# Altium PCB Testo2.PcbDoc
Units mm, origin at the board's own origin, x right, y up, seen from the top; angles counter-clockwise.
Board outline 41.56 x 22.07 mm, 2 copper layers (Top Layer, Bottom Layer), stack 0.833 mm thick; 59 components, 42 nets, 242 pads, 92 vias.
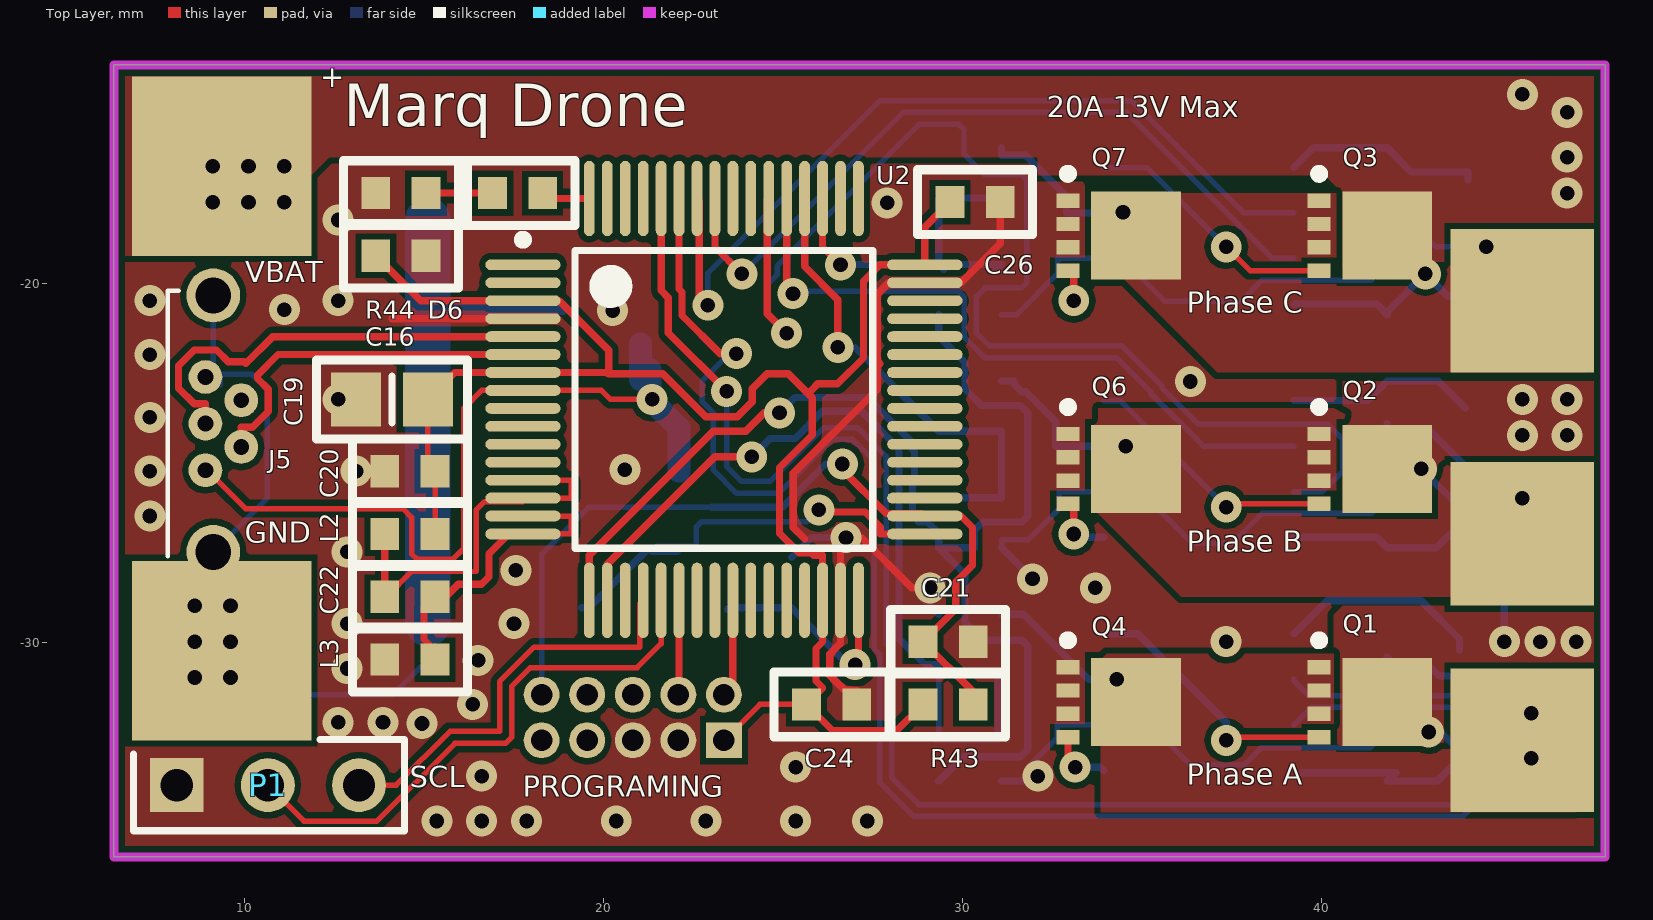
[diagram p0: Top Layer view]
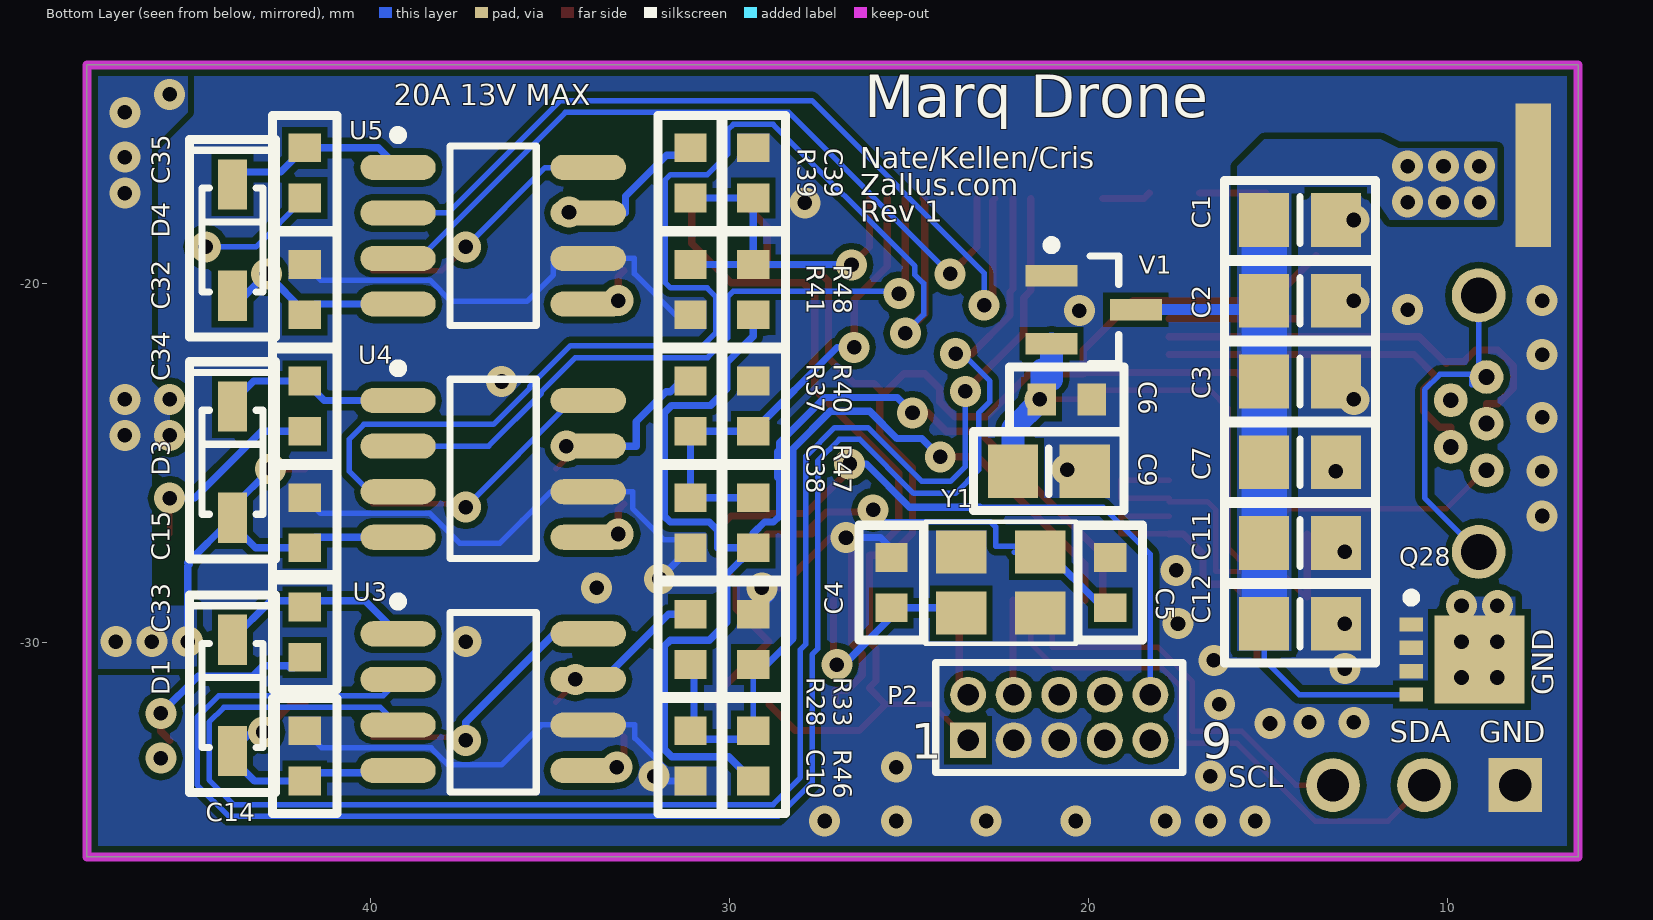
[diagram p1: Bottom Layer view, seen from below]
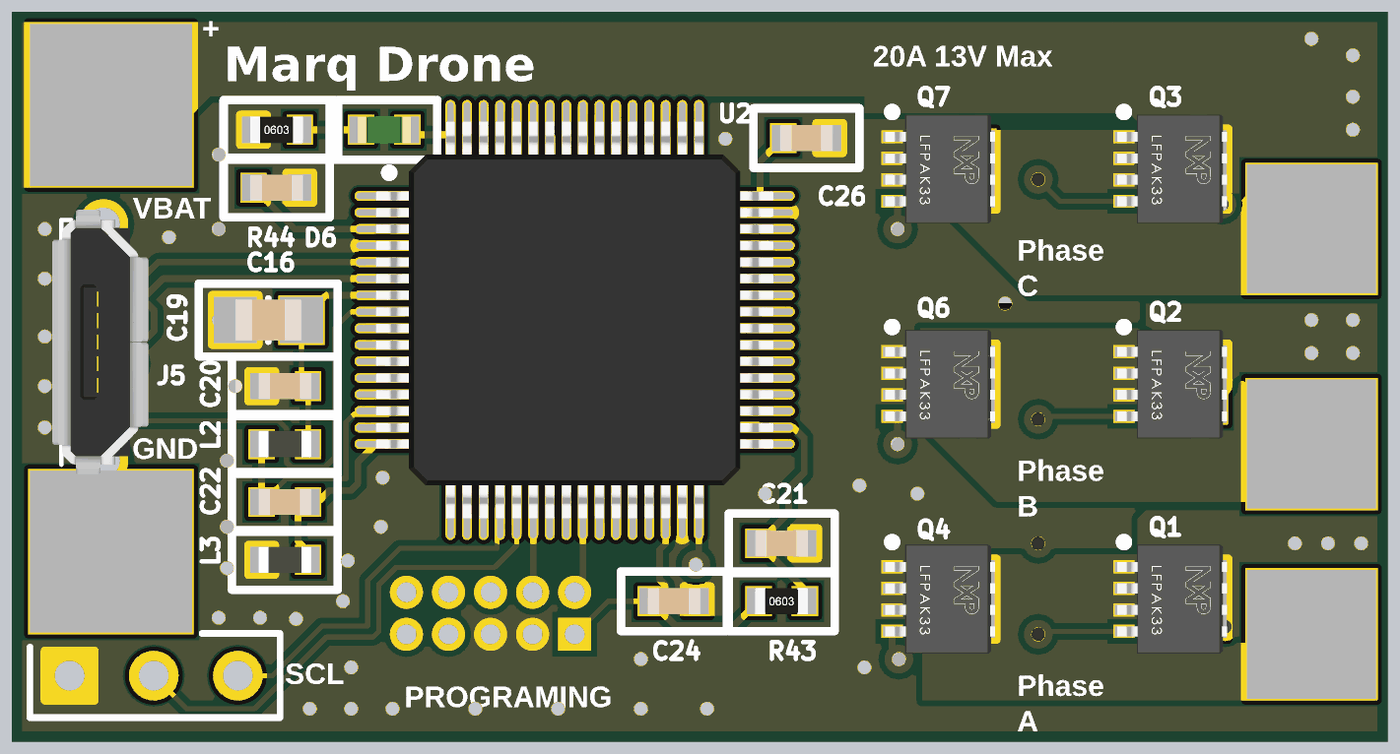
[diagram p2: 3D render of the assembled board from above, using the file's embedded part models]
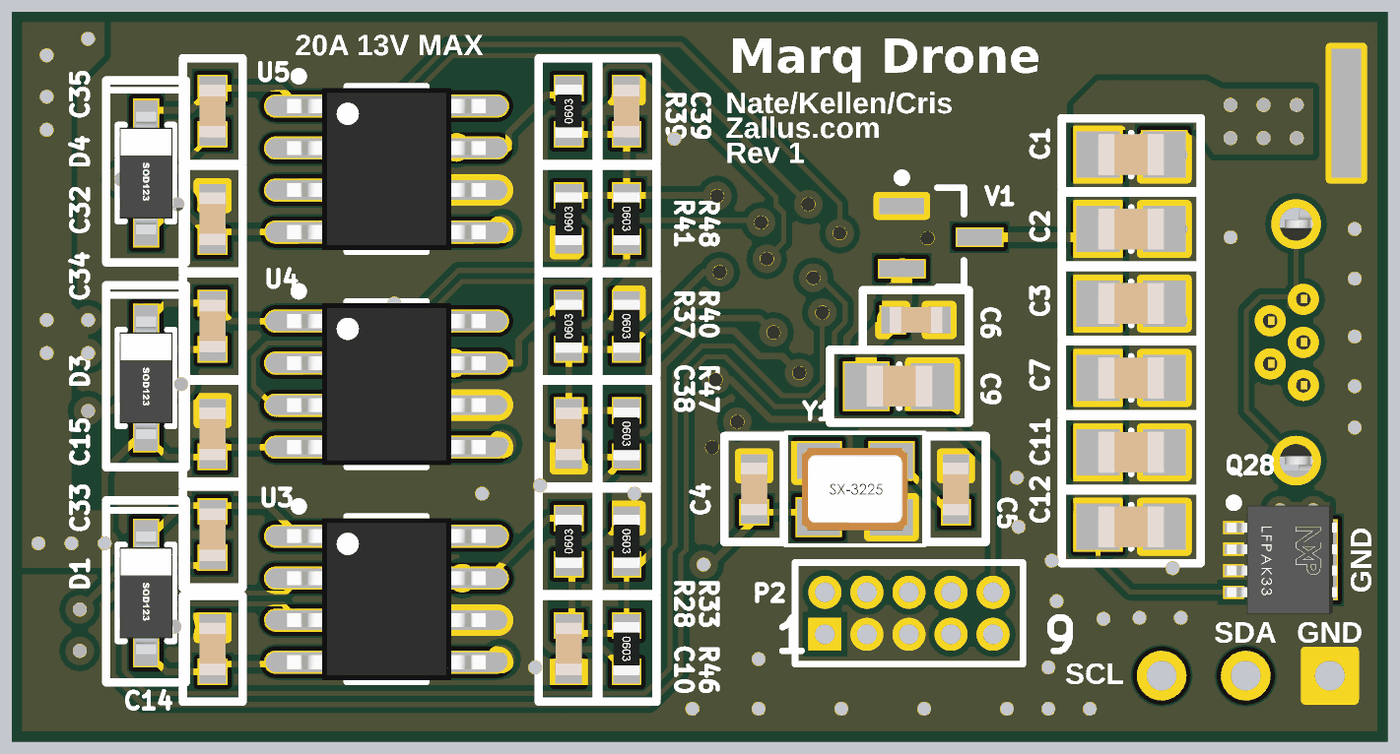
[diagram p3: 3D render of the assembled board from below, using the file's embedded part models]

## Layer stack, top to bottom
Top Solder: solder mask 0.0102, Solder Resist, Dk 3.5
Top Layer: signal copper 0.0356
Dielectric 1: dielectric 0.762, FR-4, Dk 4.8
Bottom Layer: signal copper 0.0356
Bottom Solder: solder mask 0.0102, Solder Resist, Dk 3.5

## Board outline
6.35,-35.975 6.35,-13.905 47.906,-13.905 47.906,-35.975

## Design rules (kind name [scope] priority, off if disabled: settings)
AssemblyTestPointUsage [All] p1 off:
AssemblyTestpoint [All] p1 off: testpointundercomponent=TRUE minsize=1.016 maxsize=2.54 preferedsize=1.524 minholesize=0 maxholesize=1.016 preferedholesize=0.813 testpointgrid=0.025 usegrid=TRUE gridtolerance=0 allowsidetop=TRUE allowsidebottom=TRUE
Clearance Clearance_1 [InComponent('J13') OR InComponent('J16') OR InComponent('J7')] p1: gap=0.381
Clearance Clearance_3 [InComponent('H1') OR InComponent('H3') OR InComponent('H4') OR InComponent('H5') OR InComponent('H6') OR InComponent('H7') OR InComponent('H8') OR InComponent('H9')] p2: gap=0.381
Clearance Clearance_2 [(OnLayer('Test Planea')OR OnLayer('Test Plane'))] p3: gap=0.216
Clearance [All] p4: gap=0.178
ComponentClearance [All] p1 off: gap=0.254 collisioncheckmode=3 verticalgap=0.254 showdistances=FALSE
DiffPairsRouting [All] p1: maxlimit=5.08 minlimit=0.254 mostfreqgap=0.254 toplayer_minwidth=0.203 toplayer_maxwidth=0.381 toplayer_prefwidth=0.381 bottomlayer_minwidth=0.203 bottomlayer_maxwidth=0.381 bottomlayer_prefwidth=0.381 maxuncoupledlength=25.4
FabricationTestPointUsage [All] p1 off: valid=0 allowmultiple=FALSE
FabricationTestpoint [All] p1 off: side=3 testpointundercomponent=TRUE minsize=1.016 maxsize=2.54 preferedsize=1.524 minholesize=0 maxholesize=1.016 preferedholesize=0.813 testpointgrid=0.025 allowsidetop=TRUE allowsidebottom=TRUE usegrid=TRUE gridtolerance=0
HoleSize [All] p1: absolutevalues=TRUE maxlimit=6.35 minlimit=0.025 maxpercent=80.000 minpercent=20.000
HoleToHoleClearance [All] p1: gap=0.305 allowstackedmicrovias=FALSE
MinimumSolderMaskSliver [All] p1: minsoldermaskwidth=0.152
PasteMaskExpansion [All] p1: expansion=-0.051
PlaneConnect [All] p1: planeconnectstyle=Direct reliefexpansion=0.508 reliefentries=4 reliefconductorwidth=0.508 reliefairgap=0.254
PolygonConnect PolygonConnect_1 [(InComponent('D13') OR InComponent('D13') OR InComponent('L9')OR InComponent('L9')OR InComponent('R121')OR InComponent('Q15')OR InComponent('C89')OR InComponent('C90')OR InComponent('C85')OR InComponent('C86')OR InComponent('R118')OR InComponent('C84')OR InComponent('C95')OR InComponent('U12')OR  InComponent('U10')OR InComponent('C97')OR InComponent('C98')OR InComponent('C96')OR InComponent('U11')OR InComponent('D14')OR InComponent('L10')OR InComponent('R124')OR InComponent('C93')OR InComponent('R123'))] p1: connectstyle=Direct reliefconductorwidth=0.254 reliefentries=4 polygonreliefangle="90 Angle" airgapwidth=0.254
PolygonConnect [All] p2: connectstyle=Direct reliefconductorwidth=0.254 reliefentries=4 polygonreliefangle="90 Angle" airgapwidth=0.254
RoutingVias [All] p1: holewidth=0.406 width=0.864 viastyle="Through Hole" minholewidth=0.406 minwidth=0.864 maxholewidth=0.406 maxwidth=0.864
SMDEntry [All] p1: side=TRUE corner=FALSE anyangle=TRUE
SilkToSilkClearance [All] p1: silktosilkclearance=0.025
SilkToSolderMaskClearance SilkscreenOverComponentPads [IsPad] p1: minsilkscreentomaskgap=0.025 clearancetoexposedcopper=TRUE
SolderMaskExpansion SolderMaskExpansion_1 [InComponent('U2')OR InComponent('U27')OR InComponent('J14')] p1: expansion=0
SolderMaskExpansion [All] p2: expansion=0.127
Width Width_3 [InNet('GND')] p1: maxlimit=2.032 minlimit=0.152 preferedwidth=0.203 minimp=50.000000 maximp=50.000000 favimp=50.000000
Width Width_2 [InNet('3.3V')] p2: maxlimit=1.016 minlimit=0.152 preferedwidth=0.305
Width Width_1 [InNet('5V')] p3: maxlimit=1.016 minlimit=0.152 preferedwidth=0.305
Width [All] p4: maxlimit=2.032 minlimit=0.152 preferedwidth=0.203 minimp=50.000000 maximp=50.000000 favimp=50.000000
17 further rules are at their usual default settings.

## Classes and differential pairs
differential pair USB_MCU: +USB_MCU_P -USB_MCU_N

## Components (designator, comment, footprint, x,y, rotation, side; value= is the part's Value field where it differs from the comment)
C1 "Cap" 6-0805_MC 14.1,-18.225 r0 bottom
C2 "Cap" 6-0805_MC 14.1,-20.475 r0 bottom
C3 "Cap" 6-0805_MC 14.1,-22.725 r0 bottom
C4 "CL05C180JB5NNNC" 1608[0603]C 25.486,-28.333 r270 bottom
C5 "CL05C180JB5NNNC" 1608[0603]C 19.39,-28.333 r270 bottom
C6 "0805" 1608[0603]C 20.6,-23.225 r0 bottom
C7 "Cap" 6-0805_MC 14.1,-24.975 r0 bottom
C9 "Cap" 6-0805_MC 21.1,-25.225 r0 bottom
C10 "0805" 1608[0603]C 31.087,-33.162 r90 bottom
C11 "Cap" 6-0805_MC 14.1,-27.225 r0 bottom
C12 "Cap" 6-0805_MC 14.1,-29.475 r0 bottom
C14 "0805" 1608[0603]C 41.837,-33.162 r270 bottom
C15 "0805" 1608[0603]C 41.837,-26.662 r270 bottom
C16 "0805" 1608[0603]C 14.35,-19.225 r180 top
C19 "0805" 6-0805_MC 14.1,-23.225 r180 top
C20 "0805" 1608[0603]C 14.6,-25.225 r180 top
C21 "0805" 1608[0603]C 29.6,-29.975 r180 top
C22 "0805" 1608[0603]C 14.6,-28.725 r180 top
C24 "0805" 1608[0603]C 26.35,-31.725 r180 top
C26 "0805" 1608[0603]C 30.35,-17.725 r0 top
C32 "0805" 1608[0603]C 41.837,-20.162 r270 bottom
C33 "0805" 1608[0603]C 41.837,-29.712 r90 bottom
C34 "0805" 1608[0603]C 41.837,-23.412 r90 bottom
C35 "0805" 1608[0603]C 41.837,-16.912 r90 bottom
C38 "0805" 1608[0603]C 31.087,-26.662 r90 bottom
C39 "0805" 1608[0603]C 29.337,-16.912 r270 bottom
D1 "1N4148WFL-G3-08" SOD123_3D 43.85,-31.475 r90 bottom
D3 "1N4148WFL-G3-08" SOD123_3D 43.85,-24.975 r90 bottom
D4 "1N4148WFL-G3-08" SOD123_3D 43.85,-18.783 r90 bottom
D6 "LED3" 1608[0603]LED 17.6,-17.475 r180 top
J5 "614105150721" USB_Micro_Vertical 8.9,-23.9 r90 top
L2 "FB" 1608[0603]L 14.6,-26.975 r0 top
L3 "FB" 1608[0603]L 14.6,-30.475 r180 top
P1 "Header 3" HDR1X3 8.1,-33.975 r0 top
P2 "Header 5X2" MHDR2X5 23.35,-32.725 r180 bottom
Q1 "PSMN011-60MLX" SOT1210_FET 41.337,-31.662 r0 top
Q2 "PSMN011-60MLX" SOT1210_FET 41.337,-25.162 r0 top
Q3 "PSMN011-60MLX" SOT1210_FET 41.337,-18.663 r0 top
Q4 "PSMN011-60MLX" SOT1210_FET 34.337,-31.662 r0 top
Q6 "PSMN011-60MLX" SOT1210_FET 34.337,-25.162 r0 top
Q7 "PSMN011-60MLX" SOT1210_FET 34.337,-18.663 r0 top
Q28 "PSMN011-60MLX" SOT1210_FET 9.6,-30.475 r180 bottom
R28 "Res1" 1608[0603]R 31.087,-29.912 r270 bottom
R33 "Res1" 1608[0603]R 29.337,-29.912 r90 bottom
R37 "Res1" 1608[0603]R 31.087,-23.412 r270 bottom
R39 "Res1" 1608[0603]R 31.087,-16.912 r270 bottom
R40 "Res1" 1608[0603]R 29.337,-23.412 r90 bottom
R41 "Res1" 1608[0603]R 31.087,-20.162 r270 bottom
R43 "Res1" 1608[0603]R 29.6,-31.725 r180 top
R44 "Res1" 1608[0603]R 14.35,-17.475 r180 top
R46 "Res1" 1608[0603]R 29.338,-33.162 r90 bottom
R47 "Res1" 1608[0603]R 29.338,-26.662 r90 bottom
R48 "Res1" 1608[0603]R 29.338,-20.162 r90 bottom
U2 "MKL25Z64VLH4" LQFP64_10mm_0.5mm 23.35,-23.225 r0 top
U3 "ADP3110A" SOIC8_3.9mm_body 36.587,-31.662 r180 bottom
U4 "ADP3110A" SOIC8_3.9mm_body 36.587,-25.162 r180 bottom
U5 "ADP3110A" SOIC8_3.9mm_body 36.587,-18.663 r180 bottom
V1 "MCP1702T-5002E/CB" SOT-23B_M 19.85,-20.725 r180 bottom
Y1 "CX3225GB12000P0HPQCC" 3225_Crystal 22.438,-28.333 r180 bottom

## Footprints (in the part's own frame and the unit in brackets; to place one, negate y for a bottom-side part, rotate by r counter-clockwise, add the part's x,y. Pads: shape width x height; smd on the part's side, far side on the other; paste and mask are expansions set on the pad)
6-0805_MC [mm] "Chip Resistor, Body 2.0x1.2mm, IPC Low Density"
  rect 1.4x1.5 smd: 1(-1,0) 2(1,0)
  silkscreen extent -2.1,-1.1 2.1,1.1, body extent -1,-0.62 1,0.63, height 0.59
1608[0603]C [mm] "Chip Capacitor, Body 1.6x0.8mm, IPC High Density"
  rect 0.8x0.9 smd: 1(-0.7,0) 2(0.7,0)
  silkscreen extent -1.6,-0.9 1.6,0.9, body extent -0.8,-0.4 0.8,0.4, height 0.78
1608[0603]L [mm] "Chip Capacitor, Body 1.6x0.8mm, IPC High Density"
  rect 0.8x0.9 smd: 1(-0.7,0) 2(0.7,0)
  silkscreen extent -1.6,-0.9 1.6,0.9, body extent -0.8,-0.4 0.8,0.4, height 0.8
1608[0603]LED [mm] "Chip Capacitor, Body 1.6x0.8mm, IPC High Density"
  rect 0.8x0.9 smd: 1(-0.7,0) 2(0.7,0)
  silkscreen extent -1.6,-0.9 1.6,0.9, body extent -0.8,-0.4 0.8,0.4, height 0.38
1608[0603]R [mm] "Chip Capacitor, Body 1.6x0.8mm, IPC High Density"
  rect 0.8x0.9 smd: 1(-0.7,0) 2(0.7,0)
  silkscreen extent -1.6,-0.9 1.6,0.9, body extent -0.8,-0.4 0.8,0.4, height 0.44
3225_Crystal [mm] "12 MHz Micro Crystal"
  rect 1.4x1.2 smd: 1(-1.1,-0.85) 2(1.1,-0.85) 3(1.1,0.85) 4(-1.1,0.85)
  silkscreen extent -2.1,-1.7 2.1,1.7, body extent -1.6,-1.25 1.6,1.25, height 0.81
HDR1X3 [mm] "Connector; Header; 3 Position"
  rect 1.5x1.5 hole 0.9: 1(0,0)
  round 1.5 hole 0.9: 2(2.54,0) 3(5.08,0)
  silkscreen extent -1.2,-1.27 6.35,1.28
LQFP64_10mm_0.5mm [mm] "Thin QFP, 64-Leads, Body 10x10mm, Pitch 0.5mm, IPC Low Density"
  oval 2.1x0.3 smd: 1(-5.6,3.75) 2(-5.6,3.25) 3(-5.6,2.75) 4(-5.6,2.25) 5(-5.6,1.75) 6(-5.6,1.25) 7(-5.6,0.75) 8(-5.6,0.25) 9(-5.6,-0.25) 10(-5.6,-0.75) 11(-5.6,-1.25) 12(-5.6,-1.75) 13(-5.6,-2.25) 14(-5.6,-2.75) 15(-5.6,-3.25) 16(-5.6,-3.75) 33(5.6,-3.75) 34(5.6,-3.25) 35(5.6,-2.75) 36(5.6,-2.25) 37(5.6,-1.75) 38(5.6,-1.25) 39(5.6,-0.75) 40(5.6,-0.25) 41(5.6,0.25) 42(5.6,0.75) 43(5.6,1.25) 44(5.6,1.75) 45(5.6,2.25) 46(5.6,2.75) 47(5.6,3.25) 48(5.6,3.75)
  oval 0.3x2.1 smd: 17(-3.75,-5.6) 18(-3.25,-5.6) 19(-2.75,-5.6) 20(-2.25,-5.6) 21(-1.75,-5.6) 22(-1.25,-5.6) 23(-0.75,-5.6) 24(-0.25,-5.6) 25(0.25,-5.6) 26(0.75,-5.6) 27(1.25,-5.6) 28(1.75,-5.6) 29(2.25,-5.6) 30(2.75,-5.6) 31(3.25,-5.6) 32(3.75,-5.6) 49(3.75,5.6) 50(3.25,5.6) 51(2.75,5.6) 52(2.25,5.6) 53(1.75,5.6) 54(1.25,5.6) 55(0.75,5.6) 56(0.25,5.6) 57(-0.25,5.6) 58(-0.75,5.6) 59(-1.25,5.6) 60(-1.75,5.6) 61(-2.25,5.6) 62(-2.75,5.6) 63(-3.25,5.6) 64(-3.75,5.6)
  silkscreen extent -5.72,-4.15 4.15,4.57, body extent -6,-6 6,6, height 1.6
MHDR2X5 [mm] "Connector; Header; 5x2 Position"
  rect 1x1 hole 0.6 mask+0: 1(0,0)
  round 1 hole 0.6 mask+0: 2(0,1.27) 3(1.27,0) 4(1.27,1.27) 5(2.54,0) 6(2.54,1.27) 7(3.81,0) 8(3.81,1.27) 9(5.08,0) 10(5.08,1.27)
  silkscreen extent -0.9,-0.9 5.98,2.17
SOD123_3D [mm] "SOD-123; 2 Leads; Body 2.7 x 1.6 mm, (LxW)"
  rect 1.4x0.8 smd: 1(-1.55,0) 2(1.55,0)
  silkscreen extent -2.7,-1.2 2.8,1.2, body extent -1.85,-0.8 1.85,0.8, height 1.27
SOIC8_3.9mm_body [mm] "SOIC, 8-Leads, Body 4.9x3.9mm, Pitch 1.27mm, IPC Low Density"
  oval 2.1x0.7 smd: 1(-2.65,1.905) 2(-2.65,0.635) 3(-2.65,-0.635) 4(-2.65,-1.905) 5(2.65,-1.905) 6(2.65,-0.635) 7(2.65,0.635) 8(2.65,1.905)
  silkscreen extent -2.78,-2.5 1.2,2.93, body extent -3,-2.45 3,2.45, height 1.75
SOT1210_FET [mm] "DPAK, 5-Leads, Body 3.4x2.7mm, Pitch 0.65mm, IPC High Density"
  rect 0.65x0.4 smd mask+0: 1(-1.4,0.975) 2(-1.4,0.325) 3(-1.4,-0.325) 4(-1.4,-0.975)
  rect 2.5x2.45 smd: 5(0.5,0)
  silkscreen extent -1.52,1.6 -1.27,1.85, body extent -1.61,-1.65 1.71,1.65, height 0.92
SOT-23B_M [mm] "SOT23, 3-Leads, Body 2.9x1.3mm, Pitch 0.95mm, Lead Span 2.4mm, IPC Low Density"
  rect 1.45x0.6 smd: 1(-1.175,0.95) 2(-1.175,-0.95) 3(1.175,0)
  silkscreen extent -1.3,-1.5 0.7,1.92, body extent -0.7,-1.5 0.7,1.5, height 1.14
USB_Micro_Vertical [mm] "WR-COM_USB_Micro Type B_Vertical_THT Micro Type B Vertical THT"
  round 0.94 hole 0.44 mask+0: 1(-1.3,0) 2(-0.65,-1) 3(0,0) 4(0.65,-1) 5(1.3,0)
  round 1.5 hole 1 mask+0: Z1(-3.575,-0.22) Z2(3.575,-0.22)
  silkscreen extent -3.7,0.75 3.7,1.05, body extent -3.99,-1.57 4.01,1.33, height 5.62

## Part data
C1 C2 C3 C7 C9 C11 C12: "Capacitor"
C4 C5 C6 C10 C14 C15 C16 C19 C20 C21 C22 C24 C26 C32 C33 C34 C35 C38 C39: library part "Cap Semi", "Capacitor (Semiconductor SIM Model)"
D1 D3 D4: library part "Diode 1N4148", "High Conductance Fast Diode"
D6: "Typical BLUE SiC LED"
J5: library part "WR-Communication Connectors 614105150721", "WR-COM_USB_Micro Type B_Vertical_THT"
L2 L3: library part Inductor, "Inductor"
P1: "Header, 3-Pin"
P2: "Header, 5-Pin, Dual row"
Q1 Q2 Q3 Q4 Q6 Q7 Q28: library part CMP-1258-00026-1, "N-Channel Logic Level MOSFET, 60 V, 61 A, 5-Pin SOT1210, Reel"
R28 R33 R37 R39 R40 R41 R43 R44 R46 R47 R48: "Resistor"
U2: "MKL25Z64VLH4 MCU"
V1: library part MCP1700, "MCP1700 3.3V REG"
Y1: library part 12MHz_Crystal, "12MHz Micro Crystal"

## Free pads (board coordinates)
  rect 5x5 smd: 1(9.35,-30.225) 1(9.35,-16.725)
  rect 4x4 smd: 1(45.6,-32.725) 1(45.6,-26.975) 1(45.6,-20.475)
  rect 1x4 smd far side: 3(7.6,-16.975)

## Via types
v1: diameter 0.864, hole 0.406, Top Layer to Bottom Layer, tented both sides, 92 vias

## Nets (pads, with @x,y where several pads share a name; then routed paths per layer and width w, separated by ;. In a path a pad name is that pad's centre, name@x,y a point inside that pad or via, vN(x,y) a via of type N, cw(c..) or ccw(c..) an arc to the next point about the centre after c; other vN are vias at no path point)
3.3V: C16.2 C19.1 C20.1 C24.2 C26.1 L2.2 P2.1 R43.2 U2.3 U2.7 U2.30 U2.48 | length 49.3
  Top Layer w0.152: C19.1 15.1,-25.025 C20.1 L2.2@15.3,-26.975 ; P2.1 24.35,-31.725 C24.2 ; 25.67,-23.039 25.72,-23.039 25.784,-22.975
  Top Layer w0.203: C16.2 14.9,-20.475 U2.3 18.757,-20.475 20.139,-21.857 20.139,-22.52 ; C19.1 15.85,-22.475 U2.7 20.094,-22.475 20.139,-22.52 ; 25.784,-22.975 25.967,-22.792 26.516,-22.792 27.24,-22.069 27.24,-19.93 27.694,-19.475 U2.48 28.95,-18.425 C26.1 ; R43.2 28.171,-32.454 26.379,-32.454 C24.2 26.1,-31.275 26.1,-31.254 25.918,-31.071 25.918,-30.167 26.1,-29.984 U2.30 26.1,-27.569 25.851,-27.569 25.778,-27.496 25.442,-27.496 24.902,-26.955 24.902,-25.129 25.811,-24.219 25.811,-23.18 25.67,-23.039 25.145,-22.514 24.556,-22.514 24.139,-22.93 24.139,-23.294 23.721,-23.712 22.843,-23.712 21.645,-22.514 20.145,-22.514 20.139,-22.52
3H_EXTERN: U2.46
5V: C6.2 C9.2 J5.1 U2.8 V1.2 | length 23.1
  Top Layer w0.152: J5.1@8.85,-25.025 8.85,-25.099 10.022,-26.271 14.405,-26.271 14.646,-26.512 14.646,-27.53 14.795,-27.679 15.805,-27.679 16.1,-27.384 16.1,-23.475 16.6,-22.975 U2.8 19.935,-22.975 20.185,-23.225 v1(21.35,-23.225)
  Bottom Layer w0.635: V1.2 21.025,-22.675 21.3,-22.4 C6.2 ; C6.2@21.325,-23.25 22.1,-24.025 C9.2
A_BLMA: C10.2 R28.2 R33.1 R46.2 U2.18 | length 23.5
  Top Layer w0.203: U2.18 20.1,-27.818 23.092,-24.826 v1(24.126,-24.826)
  Bottom Layer w0.152: R46.2 R33.1
  Bottom Layer w0.203: v1(24.126,-24.826) 24.635,-24.317 25.33,-24.317 26.095,-23.553 27.189,-23.553 28.227,-24.59 28.227,-29.886 28.954,-30.612 R33.1 ; R46.2@29.237,-32.694 30.987,-32.694 R28.2@30.987,-30.845
A_BLMH: U2.60 U3.3 | length 47.1
  Top Layer w0.203: U2.60 21.6,-20.189 21.799,-20.388 21.799,-21.374 v1(23.426,-23.001)
  Bottom Layer w0.152: v1(23.426,-23.001) 23.426,-25.096 23.842,-25.512 24.638,-25.512 26.14,-24.01 27.072,-24.01 27.872,-24.81 27.872,-30.044 28.026,-30.198 28.026,-33.76 28.782,-34.517 43.818,-34.517 44.504,-33.83 44.504,-32.22 44.093,-31.809 39.726,-31.809 U3.3
A_BLML: U2.59 U3.2 | length 49.6
  Top Layer w0.203: U2.59 22.1,-20.15 22.18,-20.231 22.18,-20.886 23.244,-21.95 v1(23.7,-21.95)
  Bottom Layer w0.152: v1(23.7,-21.95) 23.507,-21.95 22.74,-22.717 22.74,-23.285 23.054,-23.599 23.054,-25.191 23.705,-25.842 24.865,-25.842 26.367,-24.34 26.935,-24.34 27.541,-24.946 27.541,-30.18 27.696,-30.335 27.696,-33.897 28.646,-34.847 43.954,-34.847 44.834,-33.967 44.834,-32.083 44.23,-31.478 39.649,-31.478 39.237,-31.066 U3.2
A_PUMP: C33.2 D1.2 U3.1 | length 5.8
  Bottom Layer w0.203: U3.1 40.158,-28.837 42.787,-28.837 43.85,-29.9 D1.2@43.85,-30.225
B_BLMA: C38.2 R37.2 R40.1 R47.2 U2.52 | length 13.8
  Top Layer w0.203: U2.52 25.6,-19.519 26.525,-20.444 26.525,-21.75 v1@26.425,-21.85
  Bottom Layer w0.203: v1(26.526,-21.776) 27.001,-21.776 R40.1 R37.2 C38.2 R47.2
B_BLMH: U2.54 U4.3 | length 35.2
  Top Layer w0.203: U2.54 24.561,-17.664 24.561,-20.836 v1(25.101,-21.376)
  Bottom Layer w0.152: v1(25.101,-21.376) 24.59,-20.865 24.59,-19.992 24.831,-19.751 24.831,-19.51 28.782,-15.559 29.893,-15.559 30.042,-15.707 30.042,-16.388 30.612,-16.958 31.643,-16.958 31.791,-17.107 31.791,-19.968 31.643,-20.117 30.624,-20.117 30.383,-20.357 30.383,-21.368 30.744,-21.728 34.429,-21.728 35.572,-22.871 35.572,-22.917 36.579,-23.924 40.188,-23.924 40.6,-24.336 40.6,-25.225 40.028,-25.797 U4.3
B_BLML: U2.53 U4.2 | length 19.4
  Top Layer w0.203: U2.53 25.1,-20.225 v1@25.3,-20.425
  Bottom Layer w0.152: v1(25.276,-20.276) 25.276,-20.249 25.317,-20.208 29.893,-20.208 30.053,-20.369 30.053,-21.504 30.607,-22.058 34.293,-22.058 35.241,-23.007 35.241,-23.053 36.716,-24.527 U4.2
B_PUMP: C34.2 D3.2 U4.1 | length 5.3
  Bottom Layer w0.203: U4.1 41.292,-23.257 C34.2 43.262,-22.712 D3.2@44.012,-23.463
C_BLMA: C39.2 R39.2 R41.1 R48.2 U2.51 | length 10.6
  Top Layer w0.203: U2.51 26.1,-18.975 v1(26.6,-19.475)
  Bottom Layer w0.203: v1(26.6,-19.475) 26.613,-19.462 v1@26.675,-19.462 ; v1@26.675,-19.45 26.688,-19.463 R48.2 ; R48.2@29.481,-19.606 R48.2 ; R41.1@30.944,-19.606 R41.1 R48.2 ; R39.2 C39.2 R48.2
C_BLMH: U2.57 U5.3 | length 21.3
  Top Layer w0.203: U2.57 23.1,-18.975 v1(23.85,-19.725)
  Bottom Layer w0.152: v1(23.85,-19.725) 28.347,-15.228 34.573,-15.228 38.642,-19.298 U5.3
C_BLML: U2.58 U5.2 | length 23.8
  Top Layer w0.203: U2.58 22.663,-17.688 22.663,-20.6 22.664,-20.601 v1(22.901,-20.601)
  Bottom Layer w0.152: v1(22.901,-20.601) 22.901,-19.704 27.707,-14.898 34.71,-14.898 37.839,-18.028 U5.2
CMP_OUT: U2.1
EXTAL+: C4.2 U2.32 Y1.1 | length 6.1
  Top Layer w0.203: v1(27.01,-30.619) 27.1,-30.529 U2.32
  Bottom Layer w0.203: Y1.1@23.45,-29.075 23.492,-29.033 25.232,-29.033 26.818,-30.619 v1(27.01,-30.619)
EXTAL-: C5.2 U2.33 Y1.3 | length 12.1
  Top Layer w0.203: v1(25.994,-26.301) 26.057,-26.364 27.293,-26.364 27.709,-26.78 27.709,-26.975 U2.33
  Bottom Layer w0.152: 22.067,-27.483 Y1.3 21.504,-27.317 22.584,-27.317 22.584,-26.778 22.733,-26.629 25.666,-26.629 v1(25.994,-26.301)
  Bottom Layer w0.203: C5.2 19.592,-29.033 Y1.3@21.24,-27.385
GATE_A_H: Q1.4 U3.8 | length 7.6
  Top Layer w0.152: v1(37.35,-32.725) 37.438,-32.638 Q1.4
  Bottom Layer w0.203: U3.8 34.882,-29.757 37.35,-32.225 v1(37.35,-32.725)
GATE_A_L: Q4.4 U3.5 | length 1.9
  Top Layer w0.203: Q4.4 32.937,-33.263 v1@33.242,-33.567
  Bottom Layer w0.203: v1(33.141,-33.475) 33.845,-33.475 U3.5
GATE_B_H: Q2.4 U4.8 | length 7.6
  Top Layer w0.152: v1(37.35,-26.225) 37.438,-26.138 Q2.4
  Top Layer w0.203: v1@37.038,-26.138 v1@37.35,-26.138
  Bottom Layer w0.152: U4.8 34.383,-23.257 v1(37.35,-26.225)
GATE_B_L: Q6.4 U4.5 | length 1.8
  Top Layer w0.203: Q6.4 33.1,-26.3 v1(33.1,-26.975)
  Bottom Layer w0.203: v1(33.1,-26.975) 33.1,-27.067 U4.5
GATE_C_H: Q3.4 U5.8 | length 7.2
  Top Layer w0.152: v1(37.35,-18.975) 38.013,-19.638 Q3.4
  Bottom Layer w0.152: U5.8 33.937,-16.762 35.138,-16.762 v1(37.35,-18.975)
GATE_C_L: Q7.4 U5.5 | length 0.9
  Top Layer w0.203: Q7.4 33.1,-19.8 v1(33.1,-20.475)
GND: C1.1 C2.1 C3.1 C4.1 C5.1 C6.1 C7.1 C9.1 C10.1 C11.1 C12.1 C14.1 C15.1 C16.1 C19.2 C20.2 C21.1 C24.1 C26.2 C32.1 C38.1 C39.1 L3.2 P1.1 P2.3 P2.5 pad.3 Q4.1 Q4.2 Q4.3 Q6.1 Q6.2 Q6.3 Q7.1 Q7.2 Q7.3 Q28.1 Q28.2 Q28.3 R33.2 R40.2 R41.2 R44.2 U2.4 U2.31 U2.47 U3.6 U4.6 U5.6 V1.1 Y1.2 Y1.4 | length 67.7
  Top Layer w0.203: 14.1,-20.975 U2.4 ; 25.6,-27.115 25.283,-26.797 25.283,-25.287 27.621,-22.949 27.621,-22.297 27.693,-22.225 27.621,-22.153 27.621,-20.297 27.943,-19.975 U2.47 29.957,-19.975 31.05,-18.882 C26.2 ; C24.1 27.05,-31.33 26.715,-31.33 26.299,-30.914 26.299,-30.324 26.6,-30.023 U2.31 26.6,-27.229 v1(26.754,-27.075) 27.186,-27.075 28.586,-28.475 v1(29.1,-28.475)
  Bottom Layer w0.152: C38.1 31.087,-27.138 31.824,-27.138 32.697,-26.264 32.697,-25.797 U4.6 34.97,-25.797 35.771,-26.599 35.771,-26.604 36.396,-27.229 37.521,-27.229 38.349,-26.401 41.399,-26.401 C15.1 ; R41.2 31.512,-20.863 32.652,-19.722 32.652,-19.298 U5.6 34.911,-19.298 34.911,-19.753 35.649,-20.491 37.76,-20.491 38.349,-19.901 41.399,-19.901 C32.1 ; v1@31.837,-33.461 32.635,-32.663 32.635,-32.297 U3.6 35.24,-32.297 36.354,-33.411 37.84,-33.411 38.312,-32.939 41.361,-32.939 C14.1
  Bottom Layer w0.203: C4.1@25.232,-27.633 25.79,-27.075 v1(26.754,-27.075) ; v1(29.1,-28.475) 28.85,-28.725 R33.2 ; C10.1 32.213,-33.862 32.1,-33.75 v1(32.1,-33.725) ; C38.1 v1(31.95,-28.225)
  other v1: 15.35,-34.975 16.6,-34.975 17.85,-34.975 20.35,-34.975 22.85,-34.975 25.35,-34.975 27.35,-34.975 16.6,-33.725 25.35,-33.475 14.935,-32.258 12.6,-32.225 13.85,-32.225 16.35,-31.725 12.85,-30.725 16.5,-30.5 37.35,-29.975 12.85,-29.475 17.5,-29.475 33.7,-28.475 17.551,-27.991 12.85,-27.475 7.35,-26.475 7.35,-25.225 13.1,-25.225 20.588,-25.183 7.35,-23.725 12.6,-23.225 36.35,-22.725 7.35,-21.975 20.25,-20.75 11.1,-20.725 7.35,-20.475 12.6,-20.475 12.6,-18.225 27.9,-17.75
GND_EXT: J5.5 J5.Z1 J5.Z2 pad.1@9.35,-30.225 Q28.5 | length 9.4
  Bottom Layer w0.152: J5.Z2@9.07,-20.15 J5.Z2@9.182,-20.262 ; J5.Z1 10.624,-25.971 10.624,-22.95 10.2,-22.526 9.313,-22.526 J5.5@9.313,-22.813 ; J5.5@9.12,-22.62 J5.Z2
  other v1: 8.6,-30.975 9.6,-30.975 8.6,-29.975 9.6,-29.975 8.6,-28.975 9.6,-28.975
KL25_SWD_CLK: P2.4 U2.22 | length 2.1
  Top Layer w0.203: 22.1,-30.955 U2.22
LED: D6.1 U2.64 | length 1.4
  Top Layer w0.203: D6.1 18.45,-17.625 U2.64
NetC22_1: C22.1 L3.1 U2.15 U2.16 | length 8.8
  Top Layer w0.152: U2.16 19.1,-26.975 19.1,-26.475 U2.15
  Top Layer w0.203: L3.1 15.3,-30.127 15.203,-30.127 14.994,-29.918 14.994,-29.031 C22.1 15.6,-28.725 15.948,-28.377 16.593,-28.377 16.802,-28.168 16.802,-27.523 17.35,-26.975 U2.16
NetC22_2: C22.2 L2.1 U2.13 U2.14 | length 11
  Top Layer w0.152: C22.2 13.942,-28.725 14.646,-28.021 16.446,-28.021 16.446,-26.308 16.683,-26.071 17.75,-26.071 U2.14 19.1,-25.975 19.1,-25.475 U2.13
  Top Layer w0.203: C22.2 L2.1
NetC35_2: C35.2 D4.2 U5.1 | length 5.6
  Bottom Layer w0.203: U5.1 39.783,-16.212 C35.2 42.51,-16.885 44.087,-16.885 D4.2@44.087,-17.113
NetD6_2: D6.2 R44.1 | length 1.9
  Top Layer w0.203: R44.1 D6.2
NEUTRAL: R46.1 R47.1 R48.1 U2.17 | length 36.6
  Top Layer w0.203: U2.17 19.6,-27.569 23.054,-24.115 23.96,-24.115 24.475,-23.6 v1(24.9,-23.6)
  Bottom Layer w0.203: v1(24.9,-23.6) 25.328,-23.172 27.347,-23.172 28.608,-24.433 28.608,-24.628 28.664,-24.684 28.664,-25.391 28.608,-25.447 28.608,-26.478 28.772,-26.642 29.025,-26.642 29.338,-26.954 R47.1 ; R46.1 30.017,-33.183 31.612,-33.183 31.817,-32.978 31.817,-30.097 31.653,-29.933 30.563,-29.933 30.067,-29.437 30.067,-28.092 R47.1 ; R48.1 29.338,-21.465 30.067,-22.195 30.067,-22.937 30.522,-23.392 31.612,-23.392 31.817,-23.597 31.817,-26.478 31.653,-26.642 30.563,-26.642 30.331,-26.874 30.331,-27.362 R47.1
OUT1: C33.1 pad.1@45.6,-32.725 Q1.1 Q1.2 Q1.3 Q4.5 R28.1 U3.7 | length 10.1
  Top Layer w0.152: v1(34.298,-31.027) 34.35,-30.975 34.35,-31.175 Q4.5
  Top Layer w0.203: pad.1@45.6,-32.725 45.85,-32.475 v1(45.85,-31.975)
  Bottom Layer w0.203: R28.1 31.698,-29.212 33.513,-31.027 U3.7 ; C33.1 42.136,-30.711 42.245,-30.711 42.31,-30.646 43.002,-30.646 43.292,-30.936 44.811,-30.936 v1(45.85,-31.975)
  other v1: 45.85,-33.225
OUT2: C34.1 pad.1@45.6,-26.975 Q2.1 Q2.2 Q2.3 Q6.5 R37.1 U4.7 | length 11.3
  Top Layer w0.152: v1(34.548,-24.527) 34.6,-24.475 34.6,-24.925 Q6.5 ; pad.1@45.6,-26.975 v1(45.6,-25.975)
  Bottom Layer w0.152: U4.7 v1(34.548,-24.527)
  Bottom Layer w0.203: R37.1 31.436,-22.712 31.436,-22.801 31.644,-23.009 31.768,-23.009 32.599,-23.84 32.599,-24.527 U4.7 ; C34.1@41.837,-23.898 C34.1 43.042,-24.112 44.905,-25.975 v1(45.6,-25.975)
OUT3: C35.1 pad.1@45.6,-20.475 Q3.1 Q3.2 Q3.3 Q7.5 R39.1 U5.7 | length 7.3
  Bottom Layer w0.152: C35.1 43.2,-18.975 v1(44.6,-18.975)
  Bottom Layer w0.203: R39.1 31.087,-16.421 31.756,-16.421 32.897,-17.561 32.897,-18.028 U5.7
  other v1: 34.473,-18.008
RST_TGTMCU: C21.2 P2.10 R43.1 U2.34 | length 23.4
  Top Layer w0.203: v1(26.651,-25.026) 26.651,-25.184 27.872,-26.404 28.879,-26.404 U2.34 29.957,-26.475 30.279,-26.797 30.279,-27.844 29.811,-28.312 29.811,-29.064 C21.2 30.3,-31.375 R43.1
  Bottom Layer w0.152: 18.27,-30.955 18.27,-27.544 19.585,-26.229 23.018,-26.229
  Bottom Layer w0.203: 23.018,-26.229 24.982,-26.229 26.184,-25.026 v1(26.651,-25.026)
SCL: P1.3 U2.20 | length 11.6
  Top Layer w0.152: P1.3 14.217,-33.975 15.717,-32.475 17.1,-32.475 17.1,-31.092 18.063,-30.129 21.004,-30.129 21.004,-28.921 U2.20
SDA: P1.2 U2.21 | length 15.5
  Top Layer w0.152: P1.2 11.644,-34.979 13.68,-34.979 15.85,-32.809 17.266,-32.809 17.434,-32.641 17.434,-31.225 17.958,-30.701 20.932,-30.701 21.6,-30.033 U2.21
SWD_DIO_TGTMCU: P2.2 U2.25 | length 2.4
  Top Layer w0.203: P2.2@23.6,-31.205 U2.25
USB_MCU_N: J5.2 U2.6 | length 10.3
  Top Layer w0.203: J5.2 9.9,-23.999 10.21,-23.999 10.649,-23.56 10.649,-22.94 10.35,-22.64 10.35,-22.55 10.925,-21.975 U2.6
USB_MCU_P: J5.3 U2.5 | length 12.4
  Top Layer w0.203: J5.3 8.9,-23.349 8.59,-23.349 8.151,-22.91 8.151,-22.29 8.59,-21.851 9.21,-21.851 9.535,-22.176 9.976,-22.176 10.027,-22.227 10.779,-21.475 U2.5
VP1: C1.2 C2.2 C3.2 C7.2 C11.2 C12.2 C14.2 C15.2 C32.2 D1.1 D3.1 D4.1 pad.1@9.35,-16.725 Q1.5 Q2.5 Q3.5 Q28.4 U3.4 U4.4 U5.4 V1.3 | length 46.1
  Top Layer w0.203: Q1.5 41.837,-31.712 42.209,-31.712 v1(42.99,-32.494) ; Q2.5 v1(42.787,-25.162)
  Bottom Layer w0.152: Q28.4 14.125,-31.45 15.1,-30.475 C12.2
  Bottom Layer w0.203: U4.4 41.542,-27.067 C15.2 43.212,-27.363 D3.1@43.95,-26.625 ; U5.4 41.542,-20.568 C32.2 41.838,-20.787 v1(42.9,-19.725) 43.508,-20.333 D4.1 ; U3.4@39.462,-33.627 42.074,-33.627 C14.2 43.23,-33.863 D1.1@44.012,-33.081 ; v1(42.787,-25.162) 43.85,-26.225 D3.1 D3.1@43.95,-26.625 ; v1(42.99,-32.494) 43.319,-32.494 D1.1 ; v1(45.1,-29.975) 45.1,-27.875 45.05,-27.825 45.1,-27.775 D3.1@43.95,-26.625
  Bottom Layer w0.305: C2.2 15.35,-20.725 V1.3@18.85,-20.725
  Bottom Layer w1.27: C12.2 C11.2 C7.2 C3.2 C2.2 C1.2
  other v1: 46.1,-29.975 47.1,-29.975 45.6,-24.225 46.85,-24.225 45.6,-23.225 46.85,-23.225 9.1,-17.725 10.1,-17.725 11.1,-17.725 46.85,-17.475 9.1,-16.725 10.1,-16.725 11.1,-16.725 46.85,-16.475 46.85,-15.225 45.6,-14.725
pads on no net: J5.4 P2.6 P2.7 P2.8 P2.9 U2.2 U2.9 U2.10 U2.11 U2.12 U2.19 U2.23 U2.24 U2.26 U2.27 U2.28 U2.29 U2.35 U2.36 U2.37 U2.38 U2.39 U2.40 U2.41 U2.42 U2.43 U2.44 U2.45 U2.49 U2.50 U2.55 U2.56 U2.61 U2.62 U2.63

## Polygon pours and split planes (outlines as drawn)
VP1 on Top Layer "Top Layer-No Net 1" (solid, remove dead copper, pour order 124): 10.6,-17.225 11.6,-17.225 12.35,-16.475 32.35,-16.475 32.35,-15.225 33.1,-14.475 33.1,-13.475 5.85,-13.475 5.6,-13.225 5.6,-19.225 10.6,-19.225
GND on Top Layer "Top Layer-No Net 1" (solid, remove dead copper, pour order 149): 4.85,-12.475 5.35,-12.975 49.6,-12.975 49.6,-37.975 50.6,-38.975 49.1,-37.475 5.85,-37.475
OUT3 on Top Layer "Top Layer-No Net 1" (solid, remove dead copper, pour order 122): 39.6,-19.475 40.6,-19.475 40.6,-17.475 33.6,-17.475 33.6,-18.975 35.1,-20.475 37.1,-22.475 47.35,-22.475 47.35,-19.475
VP1 on Top Layer "Top Layer-No Net 1" (solid, remove dead copper, pour order 123): 40.6,-19.725 40.85,-19.475 48.6,-19.225 48.413,-14.412 48.367,-13.224 37.35,-13.475 32.1,-13.475 32.1,-14.725 32.1,-16.975 40.1,-16.975 40.6,-17.475
GND on Top Layer "Top Layer-No Net 1" (solid, remove dead copper, pour order 130): 30.1,-33.225 30.35,-32.975 33.6,-32.975 33.6,-17.541 33.284,-17.225 29.35,-17.225 29.35,-32.975
OUT1 on Top Layer "Top Layer-No Net 1" (solid, remove dead copper, pour order 132): 43.85,-30.975 47.35,-30.975 47.35,-34.475 47.1,-34.725 33.85,-34.725 33.85,-30.475 34.015,-30.31 40.35,-30.31 40.35,-32.885 40.44,-32.975 43.6,-32.975 43.6,-30.975
OUT2 on Top Layer "Top Layer-No Net 1" (solid, remove dead copper, pour order 134): 43.85,-25.225 47.35,-25.225 47.35,-28.725 37.35,-28.725 36.1,-28.725 33.6,-26.225 33.6,-23.475 40.35,-23.475
VP1 on Top Layer "Top Layer-No Net 1" (solid, remove dead copper, pour order 136): 47.6,-28.975 47.6,-31.475 46.1,-32.975 40.35,-32.975 40.35,-29.225 40.6,-28.975
VP1 on Top Layer "Top Layer-No Net 1" (solid, remove dead copper, pour order 138): 40.6,-26.475 47.6,-26.475 47.6,-23.225 47.6,-22.725 40.6,-22.725
VP1 on Bottom Layer "Top Layer-No Net 1" (solid, remove dead copper, pour order 142): 11.6,-18.225 8.6,-18.225 8.6,-16.225 11.35,-16.225 11.85,-15.975 15.1,-15.975 15.6,-16.475 15.85,-16.725 15.85,-17.725 15.85,-30.225 14.35,-30.225 14.35,-17.475 12.1,-17.475
VP1 on Bottom Layer "Top Layer-No Net 1" (solid, remove dead copper, pour order 144): 45.1,-13.905 45.1,-15.225 46.1,-16.225 46.1,-17.975 46.1,-22.725 45.6,-23.225 45.6,-24.225 46.1,-24.725 46.1,-28.975 44.85,-28.975 44.85,-30.725 48.35,-30.725 47.906,-30.281 47.906,-13.905
GND on Bottom Layer "Top Layer-No Net 1" (solid, remove dead copper, pour order 150): 4.6,-12.225 49.6,-12.225 50.1,-12.725 50.1,-37.475 4.6,-37.475 4.35,-37.225
GND_EXT on Bottom Layer "Top Layer-No Net 1" (solid, remove dead copper, pour order 148): 8.1,-28.725 8.1,-31.225 9.85,-31.225 9.85,-28.725

## Keep-outs
Keep-Out Layer:
  the board outline again, w0.254

## Silkscreen, mask and mechanical layers (free items; w line width, h text height)
Top Overlay:
  lines w0.2: 12.1,-32.7 14.45,-32.7
  text "+" at 12.1,-14.725 h1.02
  text "20A 13V Max" at 32.35,-15.558 h1.02
  text "Marq Drone" at 12.75,-16 h2.03
  text "VBAT" at 10.006,-20.15 h1.02
  text "Phase C" at 36.25,-21 h1.02
  text "GND" at 9.99,-27.42 h1.02
  text "Phase B" at 36.25,-27.662 h1.02
  text "Phase A" at 36.25,-34.162 h1.02
  text "SCL" at 14.6,-34.225 h1.02
  text "PROGRAMING" at 17.75,-34.5 h1.02
Bottom Overlay:
  text "20A 13V MAX" at 39.35,-15.225 h1.02
  text "Marq Drone" at 26.25,-15.75 h2.03
  text "Nate/Kellen/Cris" at 26.35,-16.975 h1.02
  text "Zallus.com" at 26.35,-17.725 h1.02
  text "Rev 1" at 26.35,-18.475 h1.02
  text "GND" at 6.85,-31.475 h1.02 r270
  text "GND" at 9.1,-32.975 h1.02
  text "SDA" at 11.6,-32.975 h1.02
  text "SCL" at 16.1,-34.225 h1.02

## Text inside footprints (layer, text, board x,y; h text height)
P2: Bottom Overlay "9" at 16.85,-33.233 h1; Bottom Overlay "1" at 24.95,-33.233 h1